# Altium PCB PCB3.PcbDoc
Units mm, origin at the board's own origin, x right, y up, seen from the top; angles counter-clockwise.
Board outline 112.39 x 73.02 mm, 2 copper layers (Top Layer, Bottom Layer); 19 components, 9 nets, 50 pads, 0 vias.
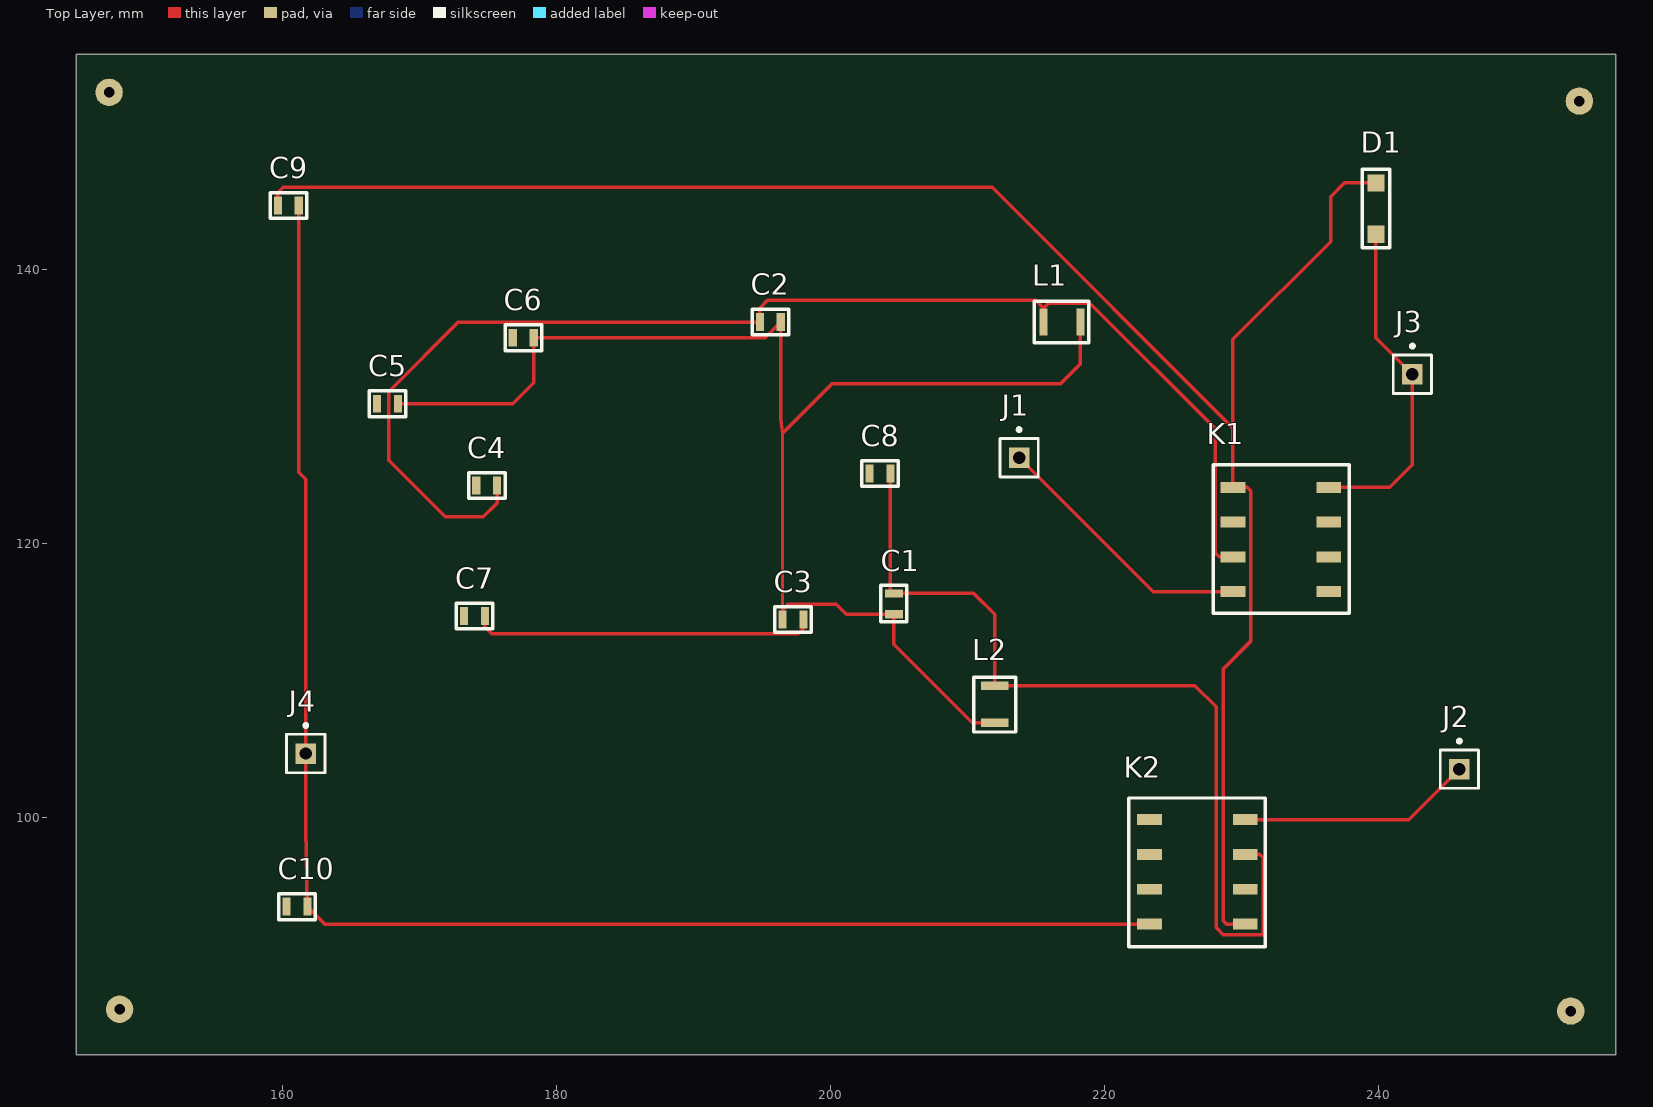
[diagram p0: Top Layer view]
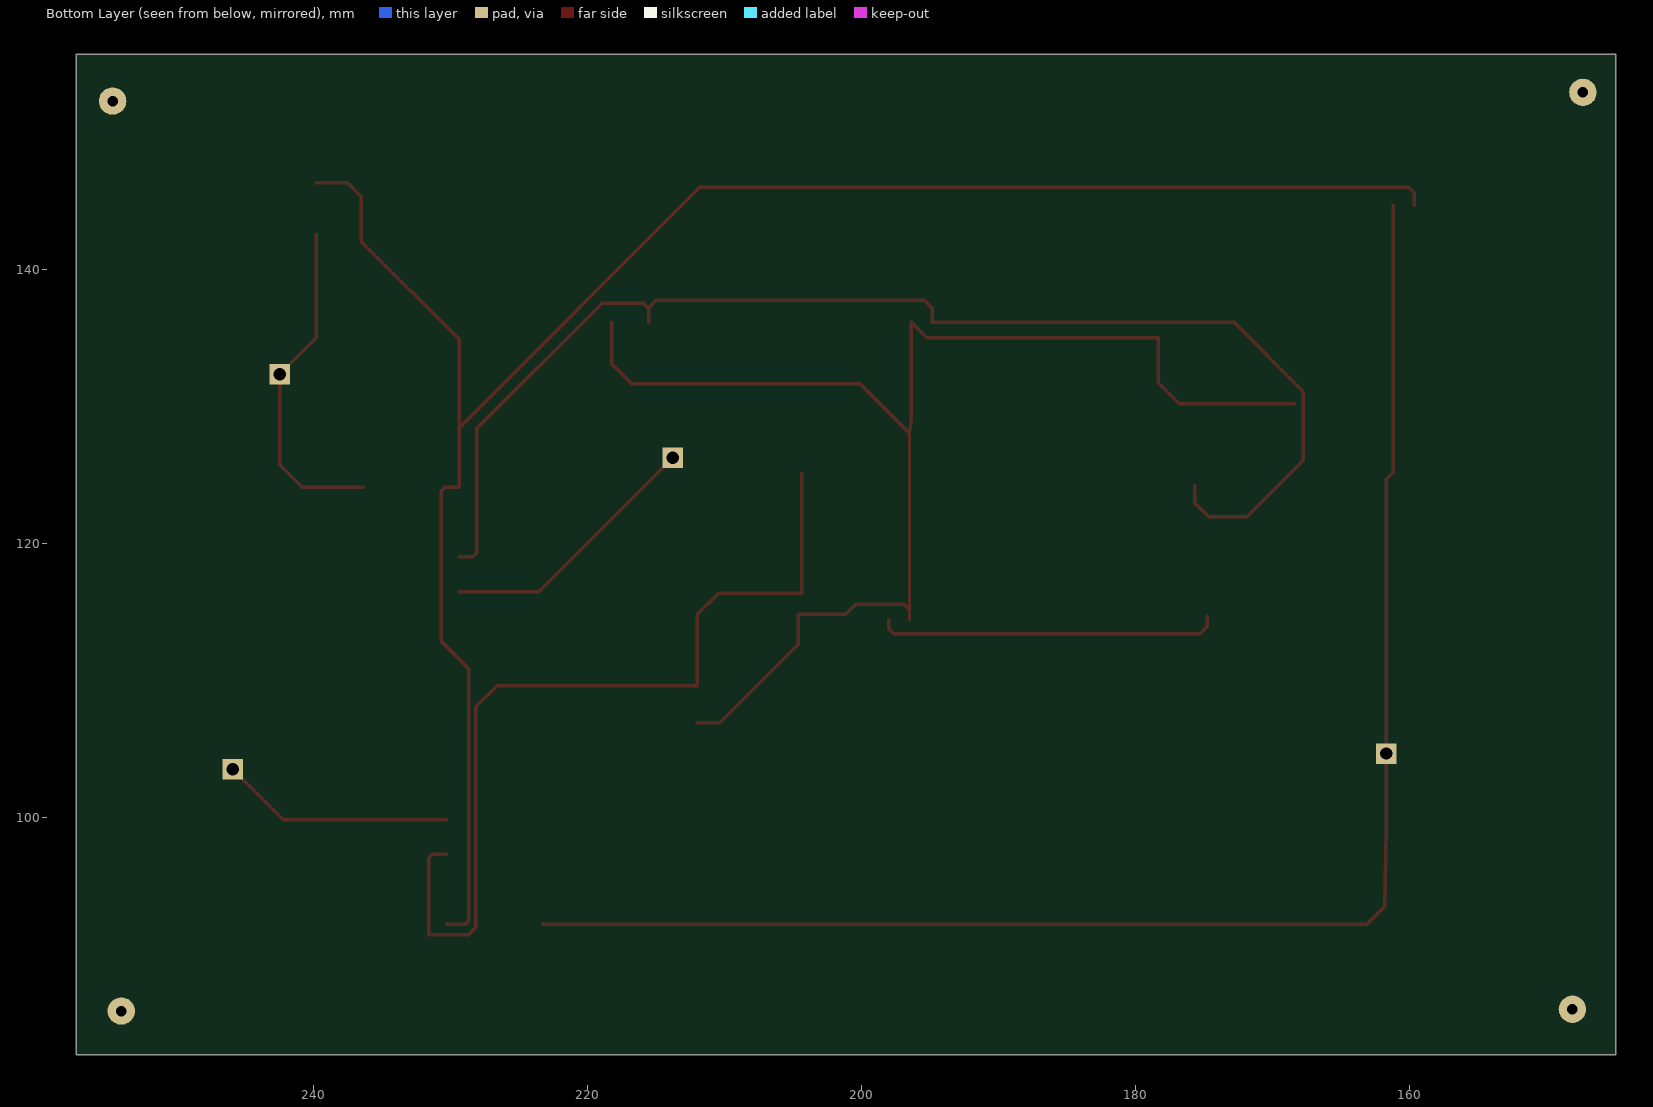
[diagram p1: Bottom Layer view, seen from below]
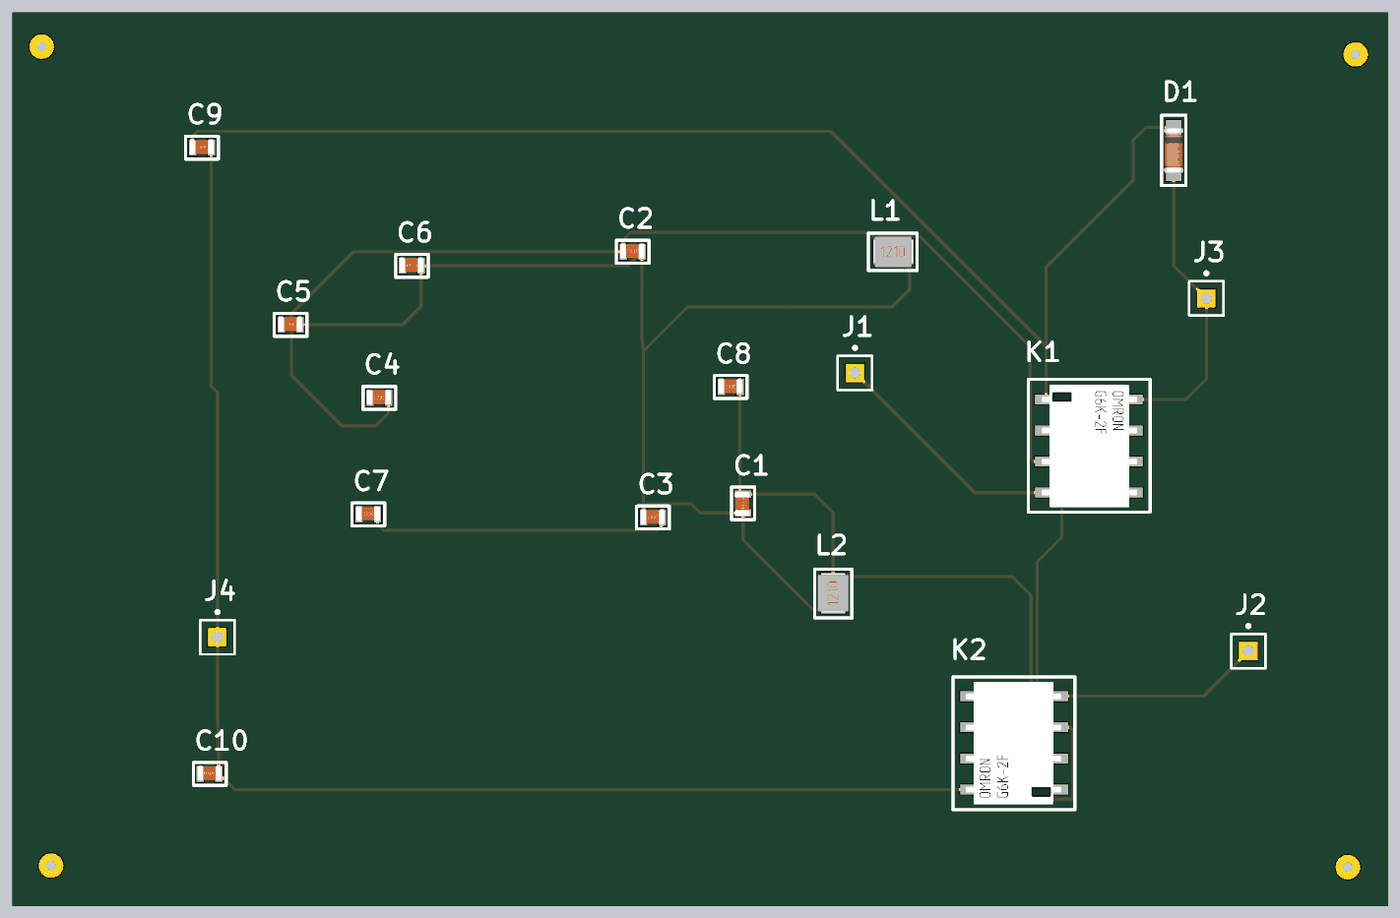
[diagram p2: 3D render of the assembled board from above, using the file's embedded part models]

## Layer stack, top to bottom
Top Solder: solder mask 0.0102, Solder Resist, Dk 3.5
Top Layer: signal copper 0.0356
Dielectric 1: dielectric 0.32, FR-4, Dk 4.8
Bottom Layer: signal copper 0.0356
Bottom Solder: solder mask 0.0102, Solder Resist, Dk 3.5

## Board outline
144.907,82.677 257.302,82.677 257.302,155.702 144.907,155.702

## Design rules (kind name [scope] priority, off if disabled: settings)
Clearance [All] p1: gap=0.254 ignorepadtopadclearanceinfootprint=FALSE except(0: Arc-Hole Track-Hole SMDPad-Hole THPad-Hole Via-Hole Fill-Hole Poly-Hole Region-Hole Text-Hole)
PolygonConnect [All] p1: connectstyle=Relief reliefconductorwidth=0.254 reliefentries=4 polygonreliefangle="90 Angle" airgapwidth=0.254
RoutingVias [All] p1: holewidth=0.711 width=1.27 viastyle="Through Hole" minholewidth=0.711 minwidth=1.27 maxholewidth=0.711 maxwidth=1.27
SolderMaskExpansion [All] p1: expansion=0.102
Width [All] p1: maxlimit=0.254 minlimit=0.254 preferedwidth=0.254
30 further rules are at their usual default settings.

## Components (designator, comment, footprint, x,y, rotation, side; value= is the part's Value field where it differs from the comment)
C1 "12пФ-5%-0805" Capacitor_0805 204.597,115.57 r90 top
C2 "68пФ-5%-0805" Capacitor_0805 195.58,136.144 r0 top
C3 "12пФ-5%-0805" Capacitor_0805 197.231,114.427 r0 top
C4 "82пФ-5%-0805" Capacitor_0805 174.879,124.206 r0 top
C5 "150пФ-5%-0805" Capacitor_0805 167.64,130.175 r0 top
C6 "180пФ-5%-0805" Capacitor_0805 177.546,135.001 r0 top
C7 "180пФ-5%-0805" Capacitor_0805 173.99,114.681 r0 top
C8 "18пФ-5%-0805" Capacitor_0805 203.581,125.095 r0 top
C9 "0,1мкФ-5%-0805" Capacitor_0805 160.401,144.653 r0 top
C10 "0,1мкФ-5%-0805" Capacitor_0805 161.036,93.472 r0 top
D1 "1N4148" 1N4148_MELF 239.776,146.304 r270 top
J1 "Socket" PIN1 213.741,126.238 r0 top
J2 "Socket" PIN1 245.872,103.505 r0 top
J3 "Socket" PIN1 242.443,132.334 r0 top
J4 "Socket" PIN1 161.671,104.648 r0 top
K1 "Relay_G6K-2F" Relay_G6K-2F 229.347,124.079 r270 top
K2 "Relay_G6K-2F" Relay_G6K-2F 230.251,92.202 r90 top
L1 "1.08 мГн-5%-1210" Inductor_1210L 216.869,136.194 r0 top
L2 "1.34 мГн-5%-1210" Inductor_1210L 211.913,108.251 r90 top

## Footprints (in the part's own frame and the unit in brackets; to place one, negate y for a bottom-side part, rotate by r counter-clockwise, add the part's x,y. Pads: shape width x height; smd on the part's side, far side on the other; paste and mask are expansions set on the pad)
1N4148_MELF [mm]
  rect 1.25x1.25 smd: 1(0,0) 2(3.75,0)
  silkscreen extent -1,-1 4.75,1, body extent 0.02,-0.8 3.72,0.8, height 1.6
Capacitor_0805 [mm]
  rect 0.6x1.3 smd: 0(-0.762,0) 1(0.762,0)
  silkscreen extent -1.32,-0.94 1.35,0.94, body extent -1.02,-0.56 0.98,0.69, height 1.3
Inductor_1210L [mm]
  rect 0.6x2 smd: 1(-1.35,-0.05) 2(1.35,-0.05)
  silkscreen extent -2.03,-1.57 1.96,1.47, body extent -1.6,-1.3 1.6,1.2, height 2.21
PIN1 [mm] "Connector; Plug"
  rect 1.5x1.5 hole 0.9: 1(0,0)
  silkscreen extent -1.4,-1.4 1.4,2.17
Relay_G6K-2F [mm]
  rect 0.8x1.8 smd: 1(0,0) 2(2.54,0) 3(5.08,0) 4(7.62,0) 5(7.62,7) 6(5.08,7) 7(2.54,7) 8(0,7)
  silkscreen extent -1.65,-1.45 9.2,8.5, body extent -1.2,-0.35 8.8,7.45, height 5.21

## Part data
C1 C3: library part Capasitor_0805, Manufacturer="Murata Electronics", PartNumber=GRM2195C2D120JV01D, href=https://www.chipdip.ru/product/grm2195c2d120j?from=suggest_product
C2: library part Capasitor_0805, Manufacturer="Murata Electronics", PartNumber=GRM2165C1H680JZ01D, href=https://www.chipdip.ru/product/grm2165c1h680j?from=suggest_product
C4: library part Capasitor_0805, Manufacturer="Murata Electronics", PartNumber=GRM2165C1H820JZ01D, href=https://www.chipdip.ru/product/grm2165c1h820j?from=suggest_product
C5: library part Capasitor_0805, Manufacturer="Murata Electronics", PartNumber=GRM2165C1H151JA01D, href=https://www.chipdip.ru/product/grm2165c1h151j?from=suggest_product
C6 C7: library part Capasitor_0805, Manufacturer="Murata Electronics", PartNumber=GRM2165C1H181JA01D, href=https://www.chipdip.ru/product/grm2165c1h181j?from=suggest_product
C8: library part Capasitor_0805, Manufacturer="Murata Electronics", PartNumber=GRM2165C1H180JZ01D, href=https://www.chipdip.ru/product/grm2165c1h180j?from=suggest_product
C9 C10: library part Capasitor_0805, Manufacturer="Murata Electronics", PartNumber=GRM21BR71E104KA01L, href=https://www.chipdip.ru/product/grm21br71e104ka01l?from=suggest_product
D1: library part Diode_1N4148
L1: library part Inductor_1210, Manufacturer=TAI-TECH, PartNumber="PASU 3225V-102J", href=https://www.chipdip.ru/product0/8034051211
L2: library part Inductor_1210, Manufacturer=TAI-TECH, PartNumber="PASU 3225V-132J", href=https://www.chipdip.ru/product0/8033890628
J1 J2 J3 J4: LatestRevisionDate=17-Jul-2002, LatestRevisionNote="Re-released for DXP Platform.", Publisher="Altium Limited"

## Free pads (board coordinates)
  round 2 hole 0.762: 1(147.32,152.908) 1(148.082,85.979) 1(254,85.852) 1(254.635,152.273)

## Nets (pads, with @x,y where several pads share a name; then routed paths per layer and width w, separated by ;. In a path a pad name is that pad's centre, name@x,y a point inside that pad or via, vN(x,y) a via of type N, cw(c..) or ccw(c..) an arc to the next point about the centre after c; other vN are vias at no path point)
NetC1_0: C1.0 C2.1 C3.0 C5.1 C6.1 L1.2 L2.1 | length 101.5
  Top Layer w0.254: C5.1 176.784,130.175 178.308,131.699 C6.1 195.199,135.001 C2.1 196.342,129.083 196.469,128.016 ; C3.0 196.469,115.164 ; L2.1 210.312,106.901 204.597,112.616 C1.0 201.117,114.808 200.381,115.545 196.85,115.545 196.469,115.164 ; L1.2 218.219,133.096 216.746,131.623 200.076,131.623 196.469,128.016 ; 196.469,115.164 196.469,128.016
NetC1_1: C1.1 C8.1 K2.3 L2.2 | length 65.8
  Top Layer w0.254: C8.1 204.343,116.332 C1.1 210.439,116.332 211.963,114.808 L2.2 226.568,109.601 228.117,108.052 228.117,91.948 228.651,91.415 231.546,91.415 231.546,97.028 231.292,97.282 K2.3
NetC2_0: C2.0 C4.1 K1.3 L1.1 | length 95.7
  Top Layer w0.254: C4.1 175.641,122.936 174.625,121.92 171.856,121.92 167.716,126.06 167.716,131.064 172.796,136.144 C2.0 194.818,137.16 195.377,137.719 214.96,137.719 215.519,137.16 ; L1.1 215.519,137.16 ; K1.3 228.346,118.999 228.041,119.304 228.041,128.384 218.9,137.525 215.884,137.525 215.519,137.16
NetC3_1: C3.1 C7.1 | length 25.1
  Top Layer w0.254: C7.1 174.752,113.894 175.26,113.386 197.612,113.386 197.993,113.767 C3.1
NetC9_0: C9.0 D1.1 K1.1 K2.1 | length 141.3
  Top Layer w0.254: C9.0 159.639,145.593 160.02,145.974 211.774,145.974 229.337,128.412 ; K2.1 228.879,92.202 228.625,92.456 228.625,110.82 230.632,112.827 230.632,123.825 230.378,124.079 K1.1 229.337,124.079 229.337,128.412 ; D1.1 237.49,146.304 236.474,145.288 236.474,142.011 229.337,134.874 229.337,128.412
NetC9_1: C9.1 C10.1 J4.1 K2.8 | length 113.4
  Top Layer w0.254: C9.1 161.163,125.171 161.671,124.663 J4.1 161.671,99.187 C10.1 163.068,92.202 K2.8
NetD1_2: D1.2 J3.1 K1.8 | length 24.7
  Top Layer w0.254: K1.8 240.792,124.079 242.443,125.73 J3.1 239.776,135.001 D1.2
NetJ1_1: J1.1 K1.4 | length 19.7
  Top Layer w0.254: J1.1 223.52,116.459 K1.4
NetJ2_1: J2.1 K2.4 | length 17.1
  Top Layer w0.254: K2.4 242.189,99.822 J2.1
pads on no net: C4.0 C5.0 C6.0 C7.0 C8.0 C10.0 K1.2 K1.5 K1.6 K1.7 K2.2 K2.5 K2.6 K2.7